# Altium PCB ImpedanceMatcher.PcbDoc
Units mil, origin at the board's own origin, x right, y up, seen from the top; angles counter-clockwise.
Board outline 1735 x 885 mil, 2 copper layers (Top Layer, Bottom Layer); 11 components, 5 nets, 31 pads, 5 vias.
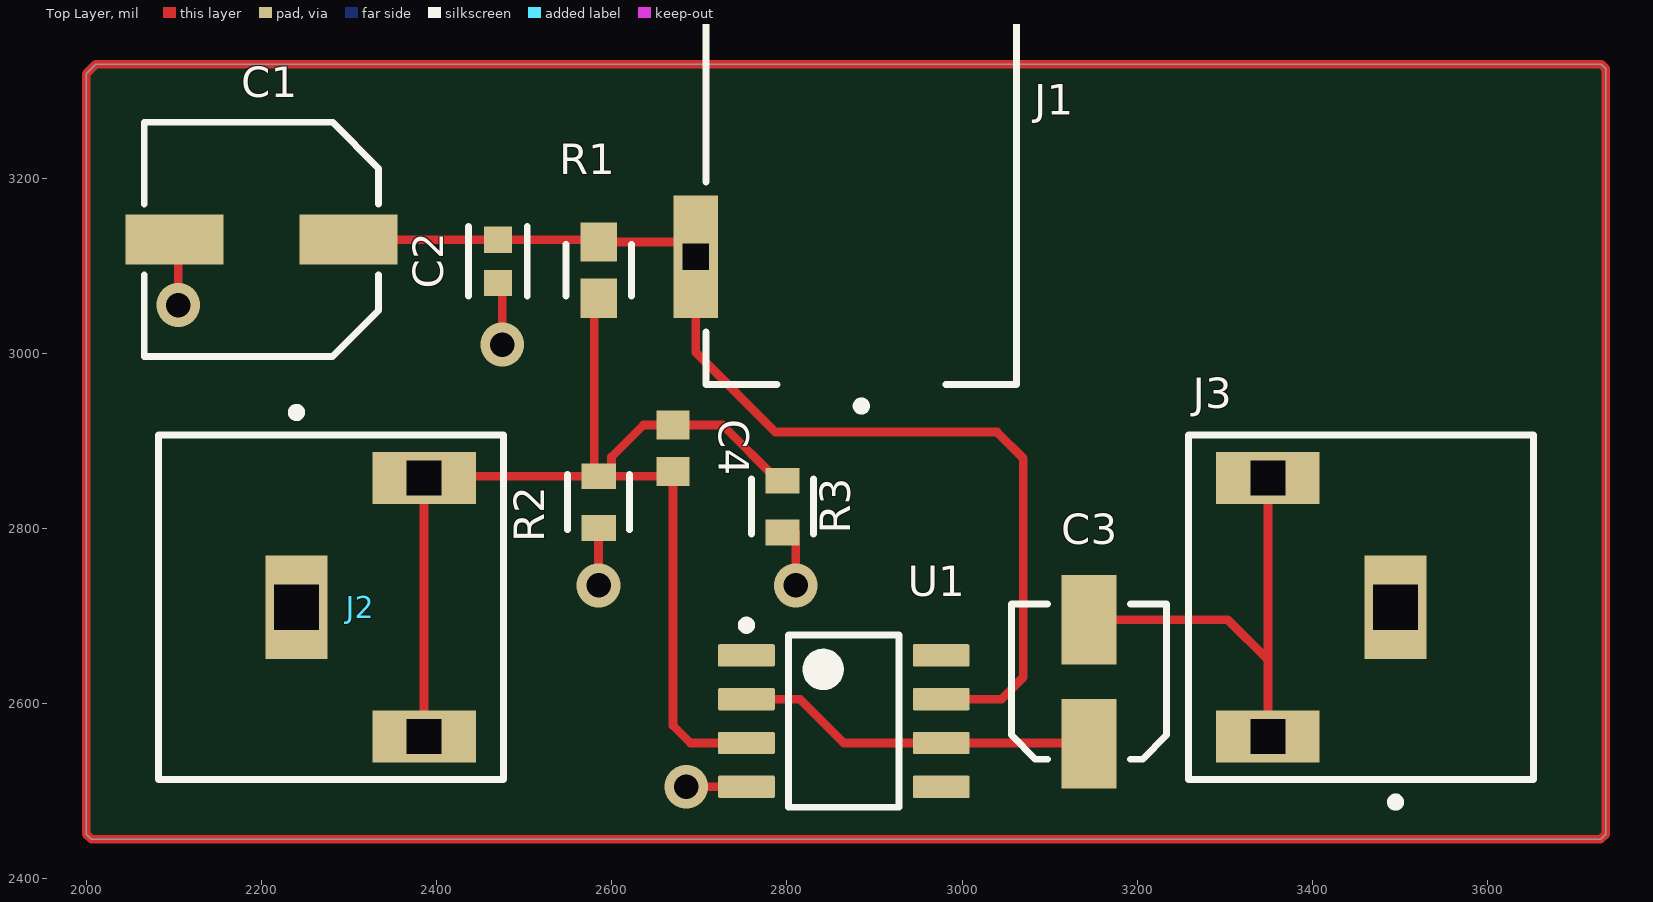
[diagram p0: Top Layer view]
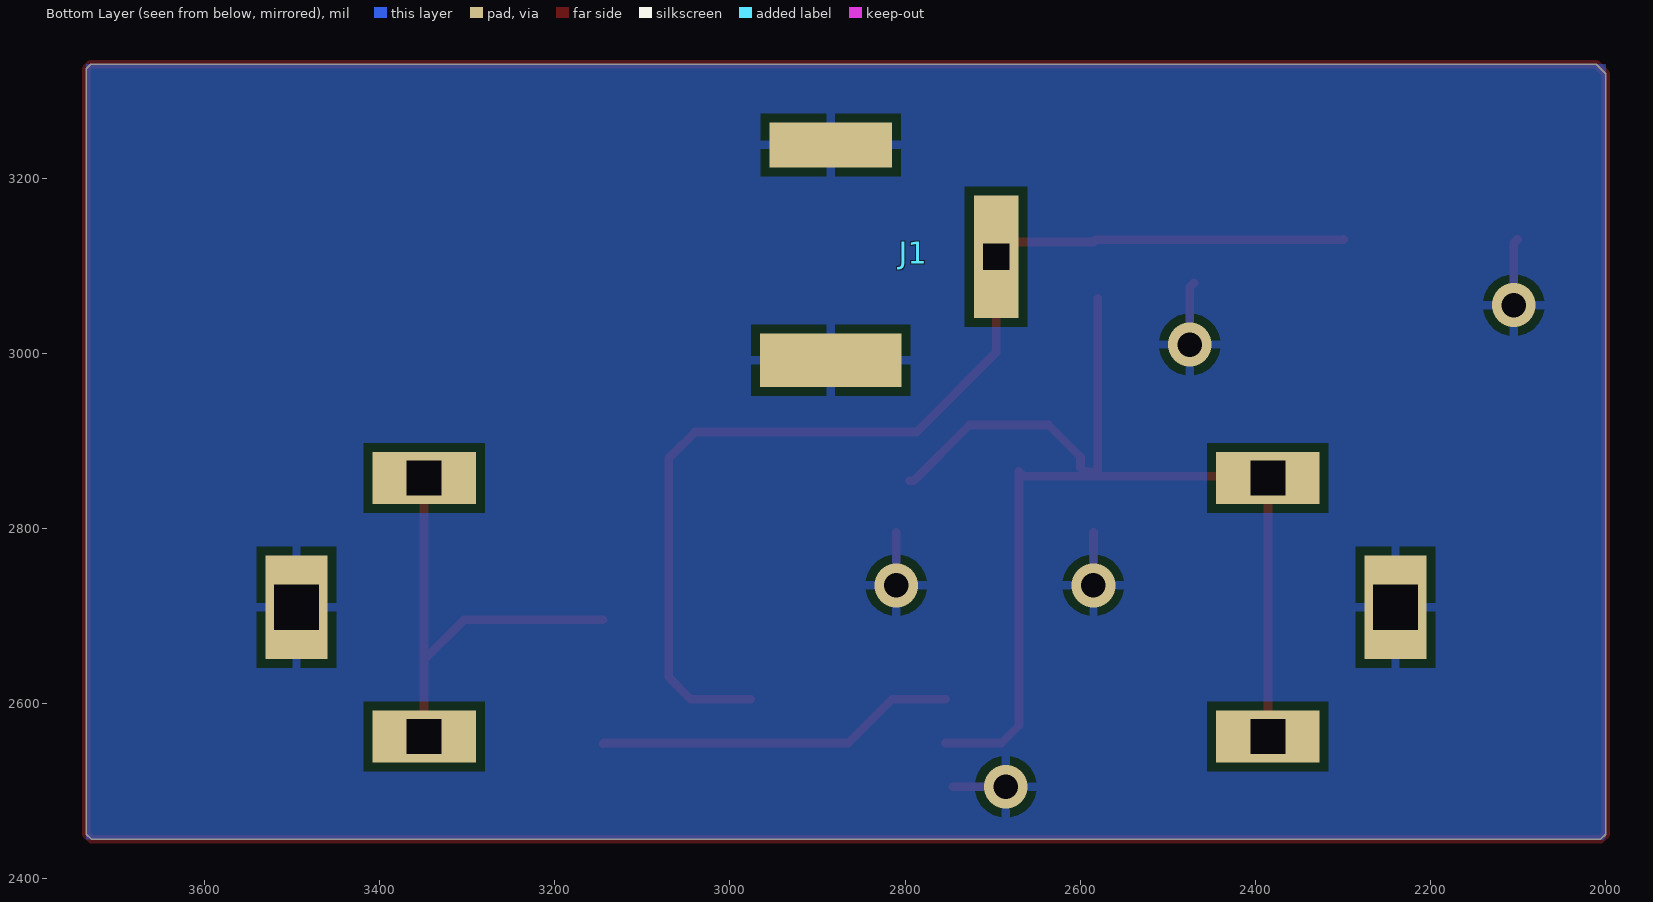
[diagram p1: Bottom Layer view, seen from below]
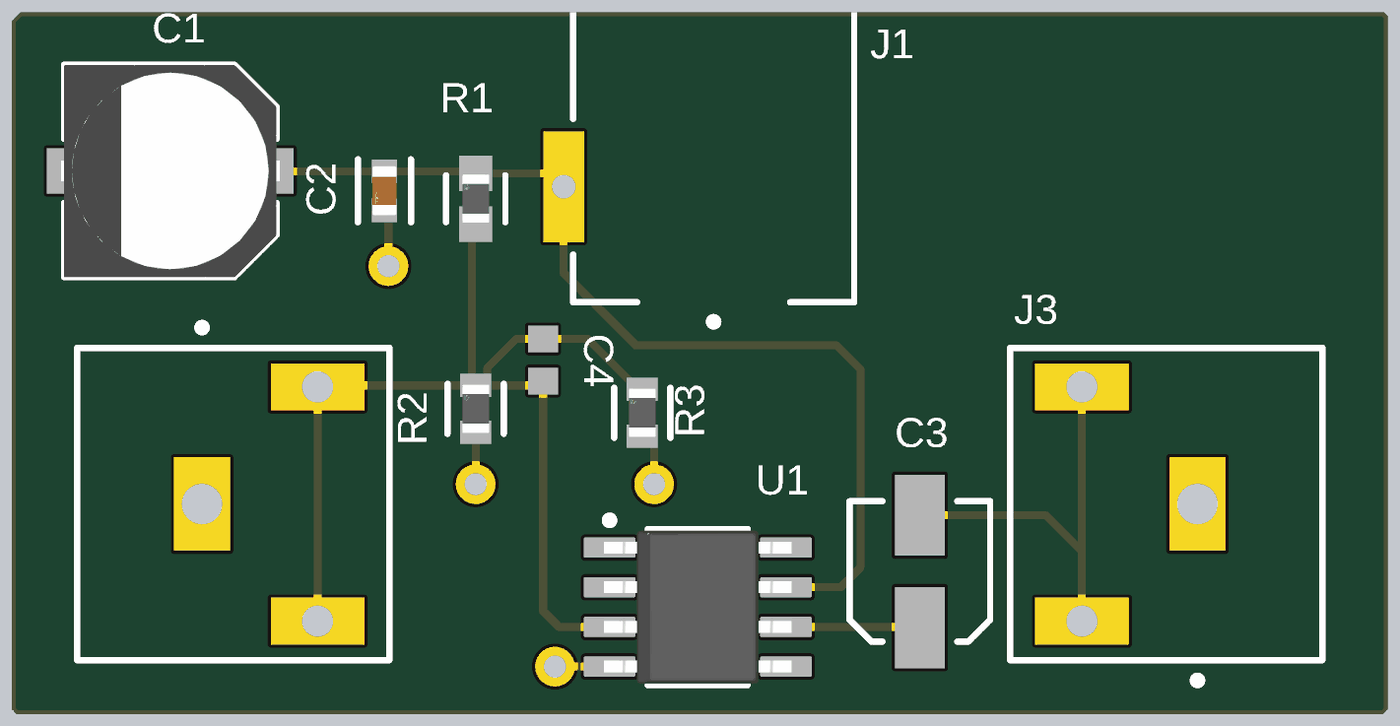
[diagram p2: 3D render of the assembled board from above, using the file's embedded part models]

## Layer stack, top to bottom
Top Solder: solder mask 0.4, Solder Resist, Dk 3.5
Top Layer: signal copper 1.4
Dielectric 1: dielectric 12.6, FR-4, Dk 4.8
Bottom Layer: signal copper 1.4
Bottom Solder: solder mask 0.4, Solder Resist, Dk 3.5

## Board outline
2005.86,2445 2000,2450.86 2000,3319.14 2010.86,3330 3730,3330 3735,3325 3735,2450.86 3729.14,2445

## Design rules (kind name [scope] priority, off if disabled: settings)
Clearance [All] p1: gap=10 ignorepadtopadclearanceinfootprint=FALSE except(0: Arc-Hole Track-Hole SMDPad-Hole THPad-Hole Via-Hole Fill-Hole Poly-Hole Region-Hole Text-Hole)
PolygonConnect [All] p1: connectstyle=Relief reliefconductorwidth=10 reliefentries=4 polygonreliefangle="90 Angle" airgapwidth=10
RoutingVias [All] p1: holewidth=28 width=50 viastyle="Through Hole" minholewidth=28 minwidth=50 maxholewidth=28 maxwidth=50
SilkToSolderMaskClearance [IsText] p1: minsilkscreentomaskgap=10 clearancetoexposedcopper=TRUE
SolderMaskExpansion [All] p1: expansion=4 istentingtop=FALSE
Width [All] p1: maxlimit=10 minlimit=10 preferedwidth=10
29 further rules are at their usual default settings.

## Components (designator, comment, footprint, x,y, rotation, side; value= is the part's Value field where it differs from the comment)
C1 "UWX1C101MCL1GB" CAPAE7067X55L 2200,3130 r180 top
C2 "GRM188R71E224KA88D" FP-GRM188-0_1-e0_2_0_5-IPC_C 2470,3105 r270 top
C3 "UUD1E100MCL1GS" NIC-CAPA2-4X5.8_V 3145,2625 r90 top
C4 "GRM188R71H102KA01D" CAPC1608X90X35NL10T15 2670,2891.57 r270 top
J1 "RAPC722X" SWITCH-RAPC712X-3_V 2885,3115 r180 top
J2 "PJRAN1X1U01X" SWIT-PJRAN1X1U01X_V 2240,2710 r270 top
J3 "PJRAN1X1U01X" SWIT-PJRAN1X1U01X_V 3495,2710 r90 top
R1 "CRCW06032M00FKEA" FP-CRCW0603-e3-IPC_A 2585,3095 r90 top
R2 "CRCW06031M00FKEA" FP-CRCW0603-e3-MFG 2585,2830 r90 top
R3 "CRCW06031M00FKEA" FP-CRCW0603-e3-MFG 2795,2825 r90 top
U1 "TL071ACD" D0008A_M 2865,2580 r0 top

## Footprints (in the part's own frame and the unit in brackets; to place one, negate y for a bottom-side part, rotate by r counter-clockwise, add the part's x,y. Pads: shape width x height; smd on the part's side, far side on the other; paste and mask are expansions set on the pad)
CAPAE7067X55L [mm] "Aluminum Electrolytic Capacitor, Body 6.80x6.80x5.50mm, IPC High Density"
  rect 2.85x1.45 smd: 1(-2.525,0) 2(2.525,0)
  silkscreen extent -3.4,-3.4 3.4,3.4, body extent -3.5,-3.4 3.5,3.4, height 5.5
CAPC1608X90X35NL10T15 [mm] "Chip Capacitor, 2-Leads, Body 1.60x0.80mm, IPC Medium Density"
  rect 0.85x0.95 smd: 1(-0.675,0) 2(0.675,0)
  body extent -0.85,-0.45 0.85,0.45, height 0.9
D0008A_M [mm] "SOIC, 8-Leads, Body 5x4mm, Pitch 1.27mm, IPC Low Density"
  rrect15% 1.65x0.65 smd: 1(-2.825,1.905) 2(-2.825,0.635) 3(-2.825,-0.635) 4(-2.825,-1.905) 5(2.825,-1.905) 6(2.825,-0.635) 7(2.825,0.635) 8(2.825,1.905)
  silkscreen extent -2.95,-2.5 1.6,2.9, body extent -3,-2.45 3,2.45, height 1.63
FP-CRCW0603-e3-IPC_A [mil]
  rect 44.69x41.82 smd paste+0 mask+0: 1(-32.1,0) 2(32.1,0)
  silkscreen extent -30,-37 30,37, body extent -74,-41 74,41, height 10
FP-CRCW0603-e3-MFG [mm]
  rect 0.75x1 smd paste+0 mask+0: 1(-0.75,0) 2(0.75,0)
  silkscreen extent -0.8,-0.9 0.8,0.9, body extent -1.22,-0.6 1.22,0.6, height 0.25
FP-GRM188-0_1-e0_2_0_5-IPC_C [mil]
  rect 29.87x31.97 smd paste+0 mask+0: 1(-24.67,0) 2(24.67,0)
  silkscreen extent -40,-33 40,33, body extent -44,-22 44,22, height 10
NIC-CAPA2-4X5.8_V [mm] "Aluminum Electrolytic Capacitor, Diameter 4mm, Height 6.1mm, Pitch 3.6mm"
  rect 2.6x1.6 smd: 1(-1.8,0) 2(1.8,0)
  silkscreen extent -2.25,-2.25 2.25,2.25, body extent -2,-1.98 2,2, height 6.1
SWIT-PJRAN1X1U01X_V [mm] "Jack, 3-Leads, Body 19.5x10mm"
  rect 3x1.8 hole 1.3 square paste-1: 1(0,0)
  rect 1.5x3 hole 1 square paste-1: 2(-3.75,3.7) 3(3.75,3.7)
  silkscreen extent -5.77,-4 5,6, body extent -5,-13.5 5,6, height 13
SWITCH-RAPC712X-3_V [mm] "CONN, 3-Leads, Body 14.5x9mm"
  rect 4.1x1.55 smd far side: 1(0,3.125)
  rect 3.55x1.3 smd far side: 2(0,-3.125)
  rect 1.3x3.55 hole 0.76 square: 3(4.8,0.125)
  silkscreen extent -4.5,-10.68 4.5,4.57, body extent -4.5,-10.68 4.5,3.83, height 11

## Part data
C1: library part CMP-2000-07374-1, "Aluminum Electrolytic Capacitor, 100 uF, +/- 20%, 16 V, -40 to 85 degC, 2-Pin SMD, RoHS, Tape and Reel", Capacitance=100µF, Case Size/Dimension=Ø6.3x5.4mm, Manufacturer=Nichicon, Operating Temp-Max=85°C, Package Description="2-Pin Surface Mount Device, Body 6.6 x 6.6 mm", Package Reference=CAPAE7067X55, Rated Voltage=16V, Datasheet URL=http://nichicon-us.com/english/products/pdfs/e-uwx.pdf, Datasheet Version=08/2015, Manufacturer URL=http://www.nichicon.co.jp/english/, Mounting Technology=SurfaceMount, Type=Can
C2: library part CMP-1035-02648-3, "Chip Multilayer Ceramic Capacitors for General Purpose, 0603, 0.22uF, X7R, 15%, 10%, 25V", Capacitance=220nF, Case Code (Imperial)=0603, Case Code (Metric)=1608, Dielectric=X7R, Max Operating Temperature=125°C, Min Operating Temperature=-55°C, Package Quantity=1, Tolerance=10%, Voltage=50V, Voltage Rating=25V, Case/Package=0603, Depth=0.8mm, Height=0.8mm, Lead Free="Lead Free", Length=1.6mm, Material=Ceramic, Mount="Surface Mount", Number of Pins=2, Packaging="Tape and Reel", Radiation Hardening=No, REACH SVHC="No SVHC", Termination=SMD/SMT, Thickness=0.035inch, Voltage Rating (DC)=25V, Width=0.8mm
C3: library part CMP-0687-00016-1, "Aluminum Electrolytic Capacitor, UD Series, Low Impedance, 10 uF, 25 V, + / - 20%, -55 to 105 degC, Chip Type, 4 x 5.8 mm D x L, Pb-Free, Reel", Manufacturer=Nichicon, Rated Capacitance="10 uF", Rated Ripple Current (at 100kHz)="80 mA", Rated Voltage="25 V", Tolerance Rated Capacitance="-20 to 20%", ComponentLink1Description="Manufacturer URL", ComponentLink1URL=http://www.nichicon.co.jp/, ComponentLink2Description=Datasheet, ComponentLink2URL=http://products.nichicon.co.jp/en/pdf/XJA043/e-ud.pdf, ComponentLink3Description="Package Specification", ComponentLink3URL=http://products.nichicon.co.jp/en/pdf/XJA043/e-ud.pdf, DatasheetVersion=08/2012, Diameter="4 mm", Endurance Time="2000 h", Impedance="1.8 Ohm", Length="5.8 mm", Mounting Technology="Surface Mount", PackageDescription="2-Pin Surface Mount Device, Diameter 4 mm, Height 5.8 mm, Pitch 3.6 mm", PackageReference=CAPAE-D4H5.8, Packing="Dia382mm Reel", PartNumber=UUD1E100MCL1GS, RoHS=TRUE
C4: library part CMP-2006-02891-1, Manufacturer=Murata, Part Number=GRM188R71H102KA01D
J1: library part CMP-2000-05384-1, "Power Jack, 5 A, 3-Pin THD, RoHS, Bulk", Color=Black, Current Rating=5A, Manufacturer=Switchcraft, Standard Package=2,500, Catalog Drawings="RAPC7(1,2)2XSide /  / RAPC7(1,2)2XTop", Category=Connectors,Interconnects, Connector Type=Jack, Contact Material=Brass, Contact Material - Plating=Nickel, Datasheet URL=http://www.mouser.com/ds/2/393/rapc722x_cd-371352.pdf, Datasheet Version="Rev. A, 08/2005", Dynamic Catalog=SwitchcraftInc, Family=Barrel-PowerConnectors, Gender=Male, Housing Color=Black, Housing Material=Thermoplastic, Internal Switch(s)=SingleSwitch,NormallyClosed, Manufacturer URL=http://www.switchcraft.com/, Mating Products="S765-ND / -CONNPLUGMINIPWR2CONDWHT/RED / S760K-ND / -CONNPOWERPLUGMINI.08\"BLACK / SC1052-ND / -CONNPOWERPLUGMINIBLACK", Mounting Type=ThroughHole,RightAngle, Number of Positions/Contacts=2Conductors,2Contacts, Other Names="Q2287470A / RAPC722X-ND / SC1313", Plug/Mating Plug Diameter=2.1mmID,5.5mmOD, RoHS Information=SwitchcraftRoHSInfo, Shielding=Unshielded, Termination=SolderEyelet(s)
J2 J3: library part CMP-1772-00003-1, "Female Phono Jack, 3 Position, Height 13 mm, Tail Length 4 mm, RoHS, Bulk", Capacitance="100 nF", Case\Package=Radial, Max Operating Temperature="125 degC", Min Operating Temperature="-55 degC", Package Quantity=500, Tolerance=10%, Type (Capacitors)=X7R, Voltage Rating="50 V", ComponentLink1Description="Manufacturer URL", ComponentLink1URL=http://www.switchcraft.com/, ComponentLink2Description=Datasheet, ComponentLink2URL=http://www.conxall.com/Drawings/pjran1x1u__x_series_cd.pdf, DatasheetVersion="Rev. A, 01/2006", Height="3.18 mm", Lead Pitch="2.54 mm", Length="6.6 mm", Mount="Through Hole", PackageDescription="Female Phono Jack, 3 Position, Height 13 mm, Tail Length 4 mm", PackageReference=PJRAN1X1U01X, Packaging=Bulk, Pins=2, Radiation Hardening=No, REACH SVHC="No SVHC", RoHSCompliant=true, Voltage Rating (DC)="50 V", Width="5.08 mm"
R1: library part CMP-2000-03189-2, "RES Thick Film, 2MΩ, 1%, 0.1W, 100ppm/°C, 0603", Case Code (Imperial)=0603, Case Code (Metric)=1608, Max Operating Temperature=155°C, Max Power Dissipation=100mW, Min Operating Temperature=-55°C, Package Quantity=10, Resistance=2MR, Temperature Coefficient=100ppm/°C, Tolerance=1%, Voltage Rating=75V, Case/Package=0603, Composition="Thick Film", Contact Plating=Tin, Depth=0.85mm, Features="Automotive AEC-Q200", Height=0.45mm, Lead Free="Lead Free", Length=1.55mm, Military Standard=Not, Number of Pins=2, Number of Terminations=2, Packaging="Tape and Reel", Power Rating=100mW, Radiation Hardening=No, Termination=SMD/SMT, Voltage Rating (DC)=75V, Weight=7.1E-05oz, Width=0.033inch, Working Voltage=75V
R2 R3: library part CMP-2000-03013-2, "RES Thick Film, 1MΩ, 1%, 0.1W, 100ppm/°C, 0603", Case Code (Imperial)=0603, Case Code (Metric)=1608, Max Operating Temperature=155°C, Max Power Dissipation=100mW, Min Operating Temperature=-55°C, Package Quantity=10, Resistance=1MR, Temperature Coefficient=100ppm/°C, Tolerance=1%, Voltage Rating=75V, Case/Package=0603, Composition="Thick Film", Contact Plating=Tin, Depth=0.85mm, Features="Automotive AEC-Q200", Height=0.45mm, Lead Free="Lead Free", Length=1.55mm, Military Standard=Not, Mount="Surface Mount", Number of Pins=2, Number of Terminations=2, Packaging="Tape and Reel", Power Rating=100mW, Radiation Hardening=No, Termination=SMD/SMT, Voltage Rating (DC)=75V, Weight=7.1E-05oz, Width=0.85mm
U1: library part CMP-0017-00458-2, "Low-Noise JFET-Input Operational Amplifier, 7 to 36 V, 0 to 70 degC, 8-pin SOIC (D8), Green (RoHS & no Sb/Br)", Manufacturer="Texas Instruments", Rating=Catalog, Total Supply Voltage(Max)(+5V is 5, +/-5V is 10)=36, Total Supply Voltage(Min)(+5V is 5, +/-5V is 10)=7, CMRR(Min)(dB)=75, Code_JEDEC=MS-012, ComponentLink1Description="Manufacturer URL", ComponentLink1URL=http://www.ti.com/, ComponentLink2Description=Datasheet, ComponentLink2URL=http://www.ti.com/lit/ds/symlink/tl071a.pdf, ComponentLink3Description="Package Specification", ComponentLink3URL=http://www.ti.com/litv/pdf/msoi002j, DatasheetVersion=SLOS080J, Eco-Plan="Green (RoHS & no Sb/Br)", GBW(Typ)(MHz)=3, IIB(Max)(pA)=200, Iq per channel(Max)(mA)=2.5, Mounting Technology="Surface Mount", Number of Channels=1, Offset Drift(Typ)(uV/C)=18, PackageDescription="8-Pin Plastic Small Outline, Body 4.9 x 3.9 mm, Pitch 1.27 mm", PackageReference=D0008A, PackageVersion="4040047-3/M, 06/2011", PartNumber=TL071ACD, Slew Rate(Typ)(V/us)=13, Sub Family="General Purpose Amplifier, High Supply Voltage Amplifier (>=30V)", Vio (25C)(Max)(mV)=6, Vn at 1kHz(Typ)(nV/rtHz)=18

## Via types
v1: diameter 50, hole 28, Top Layer to Bottom Layer, 5 vias

## Nets (pads, with @x,y where several pads share a name; then routed paths per layer and width w, separated by ;. In a path a pad name is that pad's centre, name@x,y a point inside that pad or via, vN(x,y) a via of type N, cw(c..) or ccw(c..) an arc to the next point about the centre after c; other vN are vias at no path point)
GND: C1.2 C2.2 J1.1 J1.2 J2.1 J3.1 R2.1 R3.1 U1.4 | length 337.7
  Top Layer w10: C1.2 2105,3125.59 v1(2105,3055) ; C2.2 2475,3075.33 v1(2475,3010) ; v1(2585,2735) R2.1@2585,2795.47 ; v1(2685,2505) U1.4@2745.47,2505 ; v1(2810,2735) R3.1@2810,2795.47 ; J3.1@3490,2715 J3.1
NetC3_1: C3.1 U1.2 U1.6 | length 412.3
  Top Layer w10: U1.2 2815,2605 2865,2555 U1.6 3144.13,2555 C3.1
NetC3_2: C3.2 J3.2 J3.3 | length 518.6
  Top Layer w10: C3.2 3303.46,2695.87 3349.33,2650 ; J3.2 3349.33,2650 ; J3.3 3349.33,2650
NetC4_1: C4.1 C4.2 J2.2 J2.3 R1.1 R2.2 R3.2 U1.3 | length 1440.9
  Top Layer w10: J2.3 J2.2 2387.56,2859.53 R2.2 ; R1.1@2580,3062.9 R2.2@2580,2864.53 ; U1.3 2690,2555 2670,2575 C4.2 2664.53,2859.53 R2.2 ; R3.2 2790.08,2854.53 2726.46,2918.15 C4.1 2636.3,2918.15 2599.69,2881.54 2599.69,2869.29 2594.92,2864.53 R2.2@2580,2864.53 ; R2.2@2580,2864.53 R2.2
VCC: C1.1 C2.1 J1.3 R1.2 U1.7 | length 1292.2
  Top Layer w10: C1.1 2299.74,3129.67 C2.1 2582.43,3129.67 R1.2 2679,3127.1 J1.3 2696.02,3001.02 2787.05,2910 3040,2910 3070,2880 3070,2630 3045,2605 U1.7
pads on no net: U1.1 U1.5 U1.8
copper on no net: | length 5243
  Top Layer w10: 6215,3330 6220,3325 ; 6220,1150 6225,1150 6220,1155 ; 2000,2450.86 2005.86,2445 3729.14,2445 3735,2450.86 3735,3325 3730,3330 2010.86,3330 2000,3319.14 2000,2450.86

## Polygon pours and split planes (outlines as drawn)
GND on Bottom Layer "GND_L02_P000" (solid, pour order 0): 2000,3330 1999.99,2443.7 3735.03,2445 3735,3330.01 2010.84,3330.01

## Text inside footprints (layer, text, board x,y; h text height)
J2: Mechanical 6 "PCB Edge" at 2020,2495 h25.59 r270
J3: Mechanical 6 "PCB Edge" at 3715,2925 h25.59 r90